# EAGLE board simpleSIO (EAGLE 4.16)
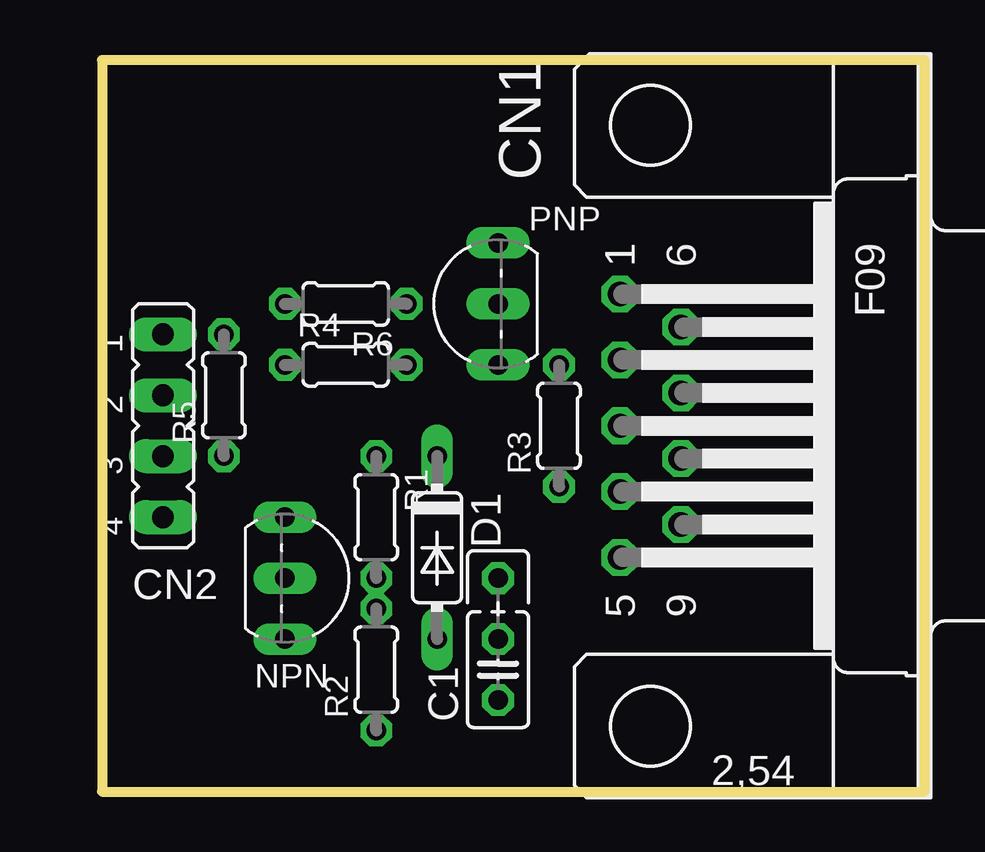
[diagram p0: board, top side]
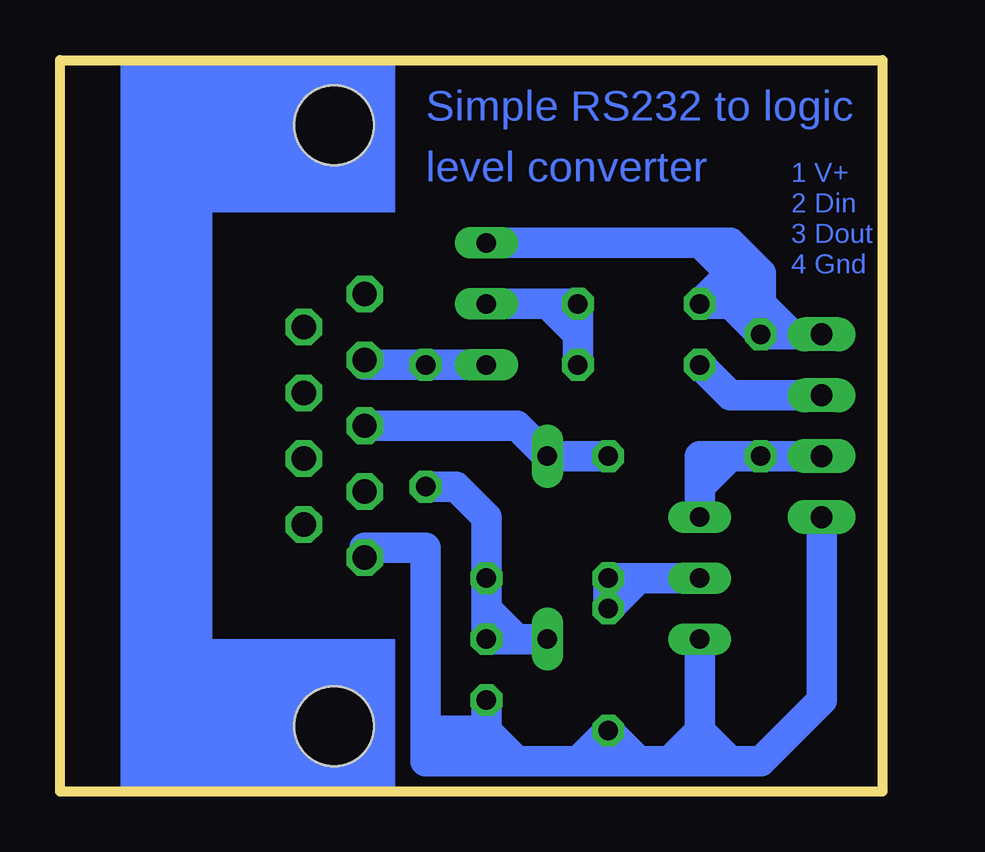
[diagram p1: board, bottom side, seen from below]

Size 34.29 x 30.48 mm. Coordinates in mm from the lower left corner, seen from the top.
Outline: 34.29,30.48 0,30.48 0,0 34.29,0 34.29,30.48
Copper layers (1*16): Top 0.035mm / dielectric 1.5mm / Bottom 0.035mm
Design rules "default": minimum track width 10mil, minimum drill 24mil, track to track 8mil, track to pad 8mil, pad to pad 8mil, via to via 8mil, smd to smd 8mil, copper to edge 40mil, drill to drill 8mil, minimum pad ring 10mil, minimum via ring 8mil, stop-mask expansion 4mil, vias tented up to drill 0mil, thermal gap 10mil

## Footprints (pad centres in the part's own frame; a part is rotated, then mirrored left to right if it is on the bottom)
C025_050-025X075 = drill 0.813 octagon: 1 -1.27,0; 2 1.27,0; 3 3.81,0
F09H = drill 1.016 octagon: 1 -5.486,-1.27; 2 -2.743,-1.27; 3 0,-1.27; 4 2.743,-1.27; 5 5.486,-1.27; 6 -4.115,1.27; 7 -1.372,1.27; 8 1.372,1.27; 9 4.115,1.27 | hole 3.302: -12.522,0; 12.522,0
JP4 = drill 0.914 long: 1 -3.81,0; 2 -1.27,0; 3 1.27,0; 4 3.81,0
DO35-7B = drill 0.813 long: A 3.81,0; C -3.81,0
TO92-CBE = drill 0.813 long: B 0,0; C 2.54,0; E -2.54,0
0204/5 = drill 0.813 octagon: 1 -2.54,0; 2 2.54,0

## Placement (x,y rotation side)
C1  220nF  [C025_050-025X075]  16.51,5.08 90 top
CN1  [F09H]  22.86,15.24 270 top
CN2  [JP4]  2.54,15.24 270 top
D1  1N4148  [DO35-7B]  13.97,10.16 270 top
NPN  [TO92-CBE]  7.62,8.89 270 top
PNP  [TO92-CBE]  16.51,20.32 90 top
R1  4K7  [0204/5]  11.43,11.43 270 top
R2  4K7  [0204/5]  11.43,5.08 90 top
R3  4K7  [0204/5]  19.05,15.24 90 top
R4  10K  [0204/5]  10.16,17.78 0 top
R5  10K  [0204/5]  5.08,16.51 90 top
R6  10K  [0204/5]  10.16,20.32 180 top

## Library data of the parts
C1 R1-R6 = rcl
CN1 = con-subd
CN2 = jumper
D1 = diode
NPN PNP = transistor-npn

## Nets
S$1: NPN.B R1.2 R2.2
S$2: C1.2 C1.3 D1.A R3.1
S$3: PNP.E R3.2
S$4: C1.1 CN2.4 NPN.C R2.1
S$5: CN1.3 D1.C R1.1
S$7: CN2.3 NPN.E R5.1
S$8: CN2.2 R4.1
S$9: PNP.B R4.2 R6.1
S$12: CN2.1 PNP.C R6.2

## Tracks (layer width: path | path; a pad name or v marks a point on that pad's centre or on a via)
S$1
  Bottom 1.016: R2.2 R1.2
  Bottom 1.27: NPN.B 10.16,8.89 | 10.16,8.89 R1.2 R2.2 10.16,8.89
S$2
  Bottom 1.27: 16.51,7.62 C1.2 15.24,6.35 | 16.51,7.62 C1.3 16.51,11.43 17.78,12.7 R3.1 | D1.A 15.24,6.35 | 15.24,6.35 16.51,7.62
S$3
  Bottom 1.27: PNP.E R3.2 21.59,17.78
S$4
  Bottom 1.27: C1.1 16.51,2.54 | 16.51,2.54 16.51,1.27 | 21.59,10.16 19.05,10.16 19.05,2.54 | 19.05,2.54 19.05,1.27 17.78,1.27 | 11.43,1.27 R2.1 | 11.43,1.27 12.7,1.27 | 12.7,1.27 15.24,1.27 | 15.24,1.27 17.78,1.27 | CN2.4 2.54,3.81 5.08,1.27 6.35,1.27 | 6.35,1.27 7.62,1.27 | 7.62,1.27 8.89,1.27 | 8.89,1.27 10.16,1.27 | 10.16,1.27 11.43,1.27 | NPN.C 7.62,2.54 | 7.62,2.54 7.62,1.27 | 7.62,2.54 6.35,1.27 | 7.62,2.54 8.89,1.27 | 16.51,2.54 15.24,1.27 | 16.51,2.54 17.78,1.27 | 17.78,1.27 19.05,2.54 | 19.05,2.54 16.51,2.54 | 10.16,1.27 R2.1 | R2.1 12.7,1.27
S$5
  Bottom 1.27: CN1.3 15.24,15.24 D1.C R1.1
S$7
  Bottom 1.27: CN2.3 R5.1 6.35,13.97 | 6.35,13.97 7.62,13.97 7.62,12.7 | 7.62,12.7 NPN.E | 6.35,13.97 7.62,12.7
S$8
  Bottom 1.27: CN2.2 6.35,16.51 R4.1
S$9
  Bottom 1.27: R4.2 12.7,19.05 | 12.7,19.05 R6.1 13.97,20.32 | 13.97,20.32 PNP.B | 13.97,20.32 12.7,19.05
S$12
  Bottom 1.27: CN2.1 3.81,19.05 | 3.81,19.05 5.08,19.05 | 5.08,19.05 5.08,20.32 | 5.08,20.32 5.08,21.59 | 5.08,21.59 6.35,22.86 | 6.35,22.86 7.62,22.86 | 7.62,22.86 PNP.C | 6.35,20.32 R6.2 6.35,21.59 | 6.35,20.32 5.08,20.32 | 5.08,21.59 6.35,20.32 | 6.35,20.32 5.08,19.05 | 6.35,22.86 6.35,21.59 | 6.35,21.59 6.35,20.32 | 7.62,22.86 6.35,21.59 | 5.08,20.32 3.81,19.05
(copper drawn outside any net)
  shapes: Bottom area x4

## Text on the board
Bottom: Simple RS232 to logic | 1 V+ | level converter | 2 Din | 3 Dout | 4 Gnd